# Altium PCB PCB1.PcbDoc
Units mm, origin at the board's own origin, x right, y up, seen from the top; angles counter-clockwise.
Board outline 45.09 x 60.07 mm, 2 copper layers (Top Layer, Bottom Layer); 25 components, 27 nets, 109 pads, 31 vias.
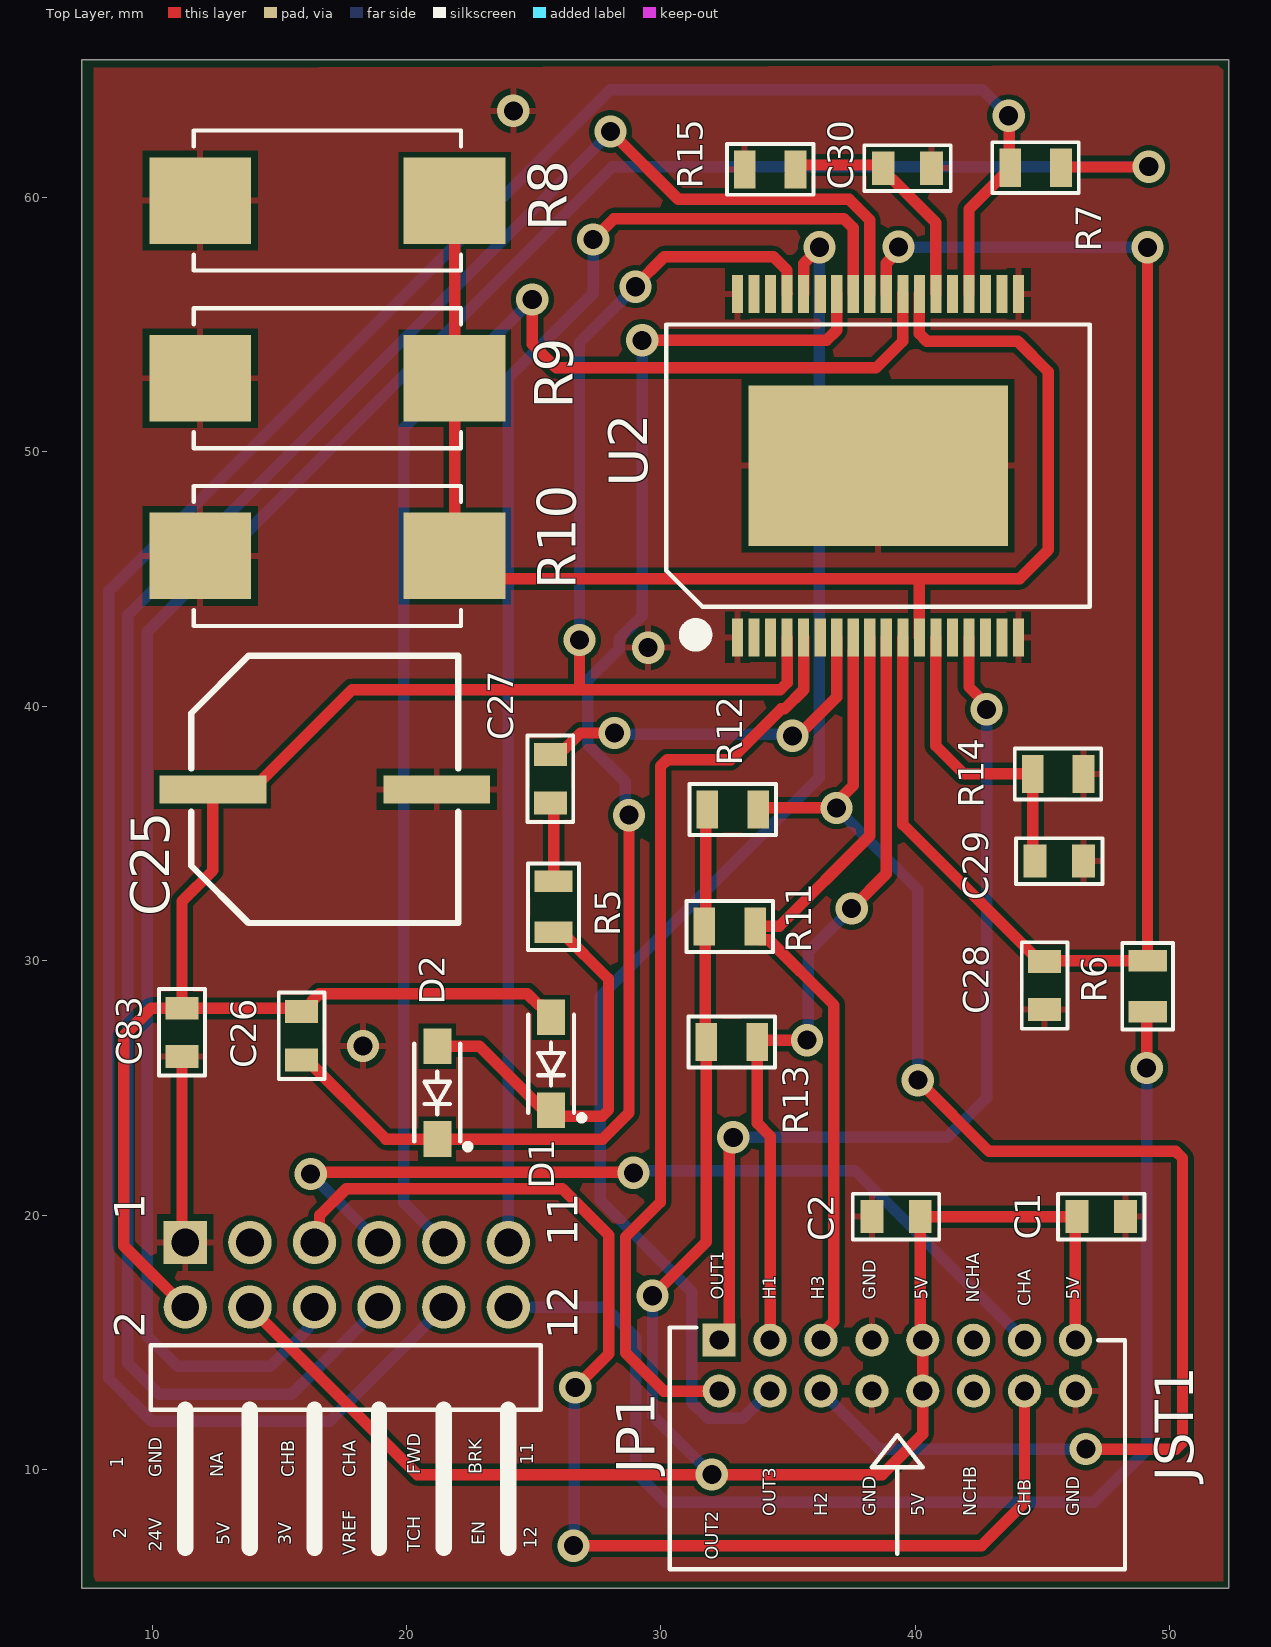
[diagram p0: Top Layer view]
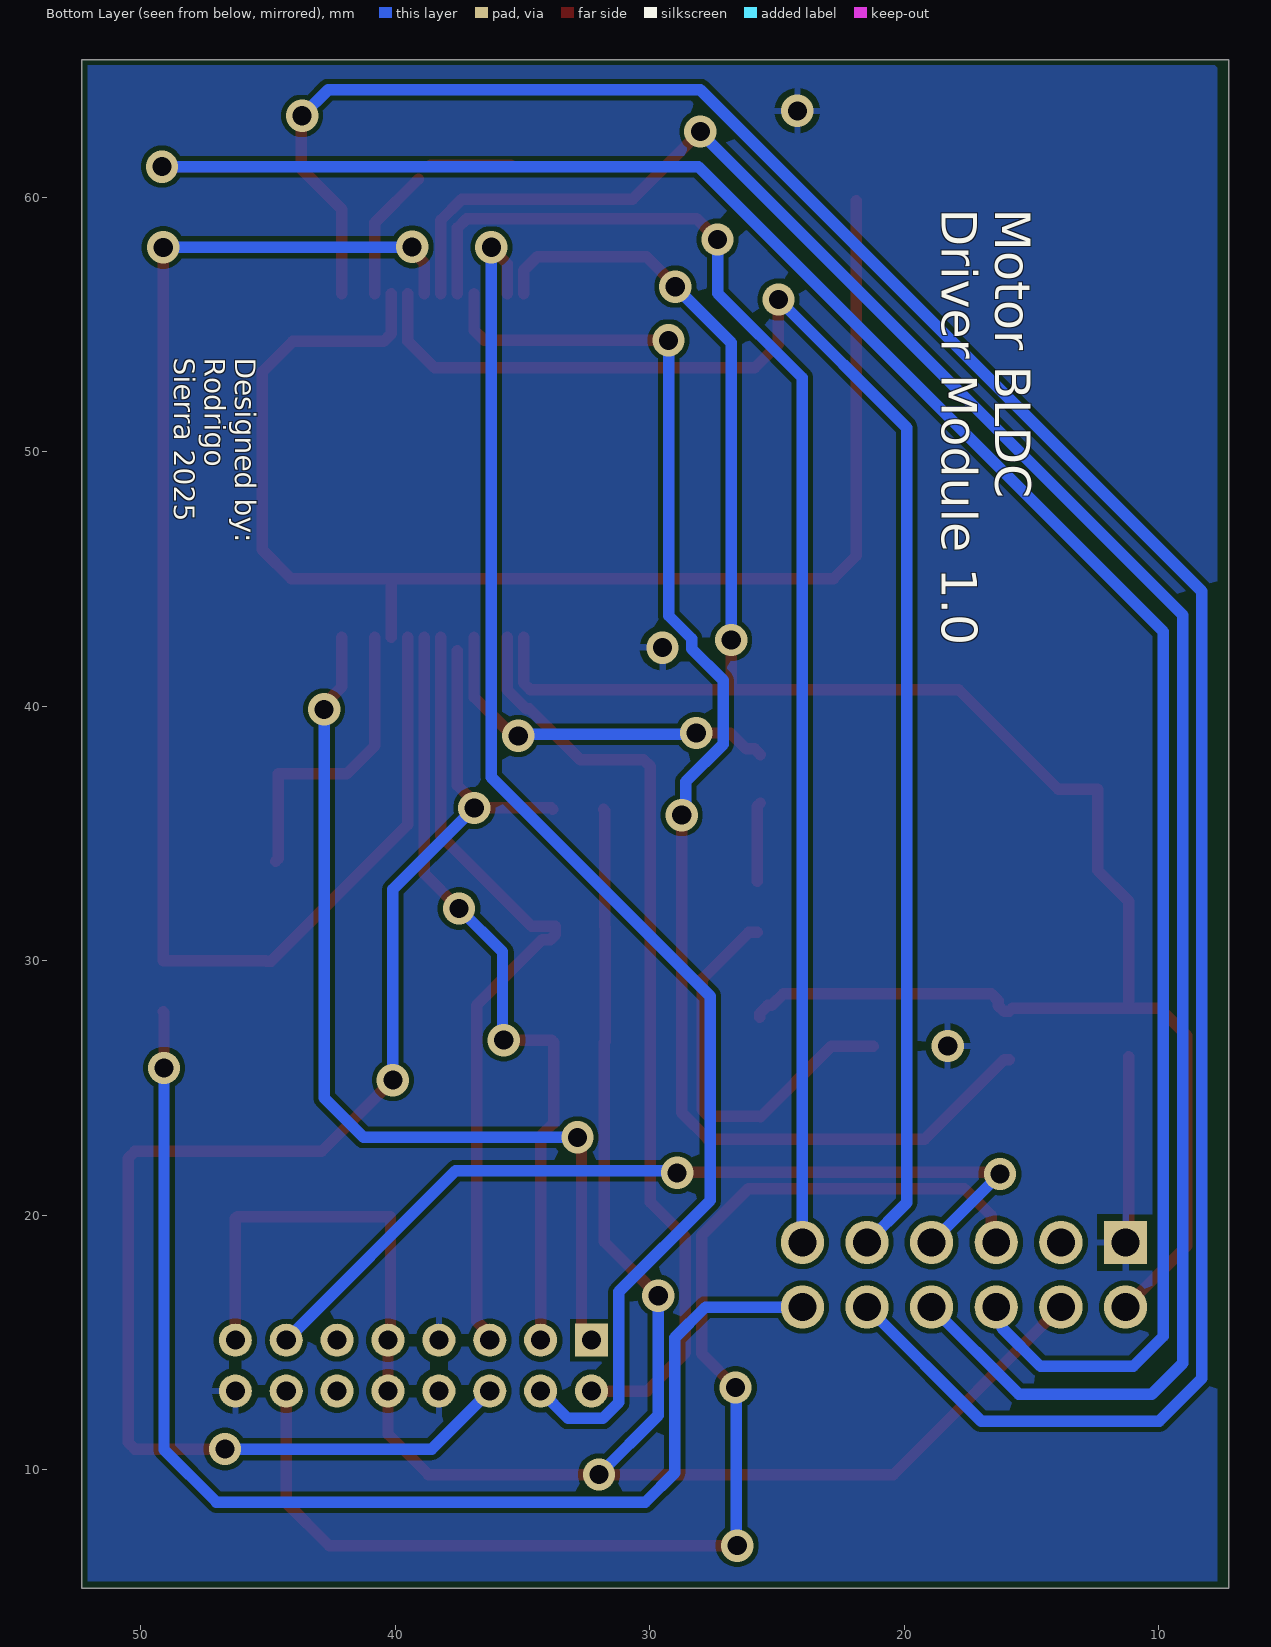
[diagram p1: Bottom Layer view, seen from below]
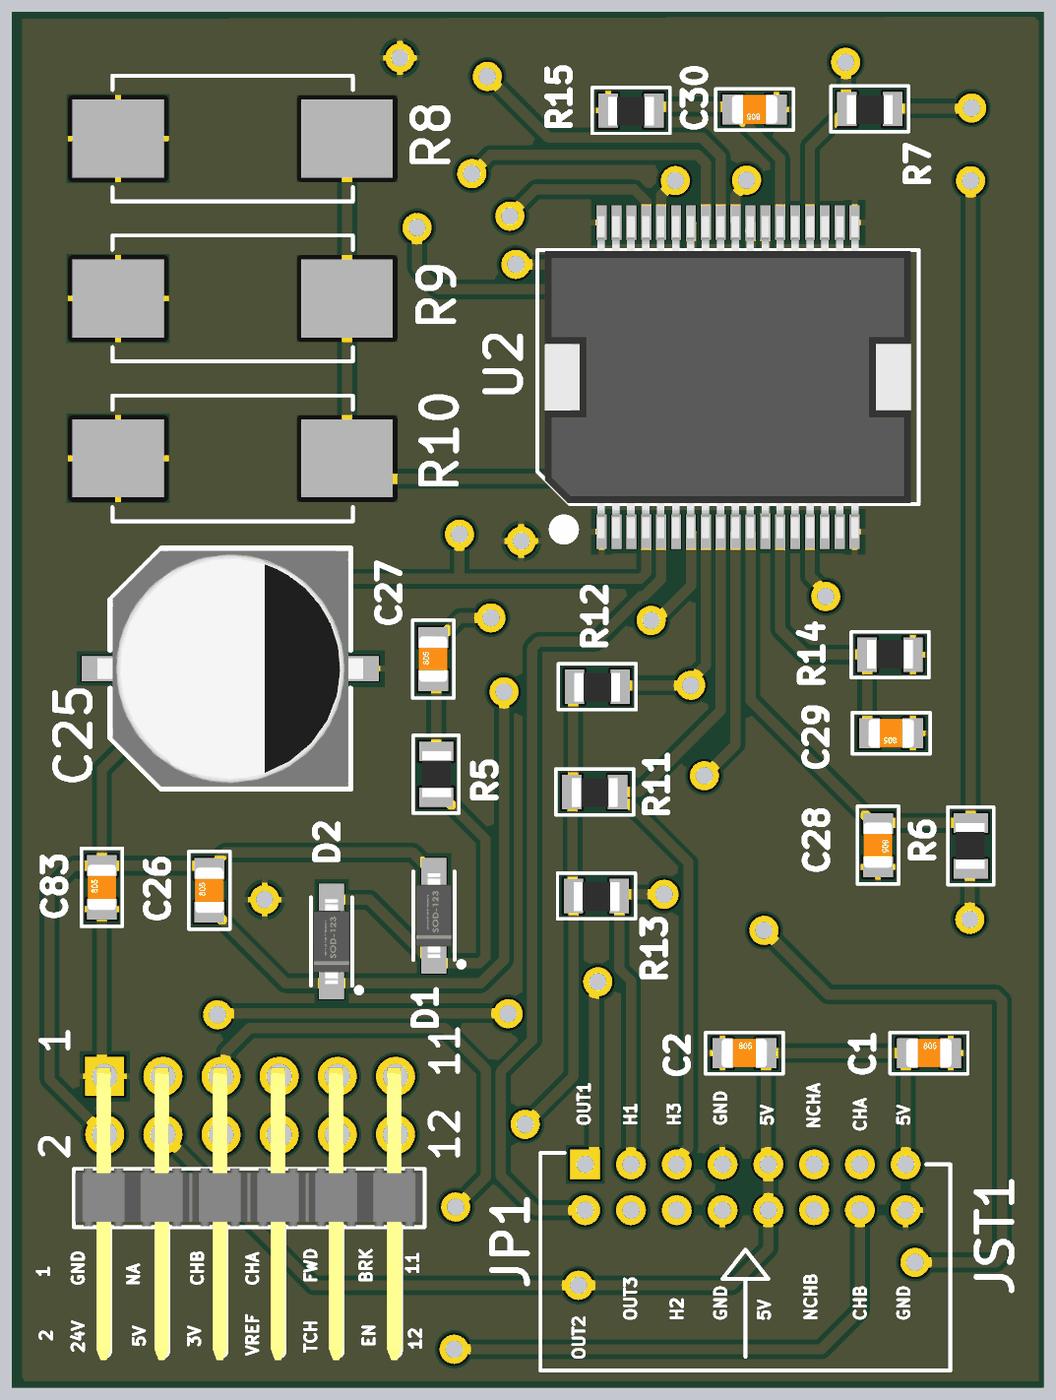
[diagram p2: 3D render of the assembled board from above, using the file's embedded part models]

## Layer stack, top to bottom
Top Solder: solder mask 0.0102, Solder Resist, Dk 3.5
Top Layer: signal copper 0.0356
Dielectric 1: dielectric 0.32, FR-4, Dk 4.8
Bottom Layer: signal copper 0.0356
Bottom Solder: solder mask 0.0102, Solder Resist, Dk 3.5

## Board outline
7.239,5.334 52.324,5.334 52.324,65.405 7.239,65.405

## Design rules (kind name [scope] priority, off if disabled: settings)
Clearance [All] p1: gap=0.2 ignorepadtopadclearanceinfootprint=FALSE
ComponentClearance [All] p1: gap=0.15 collisioncheckmode=3 verticalgap=0.15 showdistances=FALSE
DiffPairsRouting [All] p1: maxlimit=0.254 minlimit=0.05 mostfreqgap=0.254 toplayer_minwidth=0.05 toplayer_maxwidth=0.381 toplayer_prefwidth=0.381 bottomlayer_minwidth=0.05 bottomlayer_maxwidth=0.381 bottomlayer_prefwidth=0.381 maxuncoupledlength=12.7
Height [All] p1: minheight=0 maxheight=25.4 prefheight=25.4
HoleSize [All] p1: absolutevalues=TRUE maxlimit=2.54 minlimit=0.4 maxpercent=80.000 minpercent=20.000
HoleToHoleClearance [All] p1: gap=0.05 allowstackedmicrovias=TRUE
MinimumSolderMaskSliver [All] p1: minsoldermaskwidth=0.05
PolygonConnect [All] p1: connectstyle=Relief reliefconductorwidth=0.254 reliefentries=4 polygonreliefangle="90 Angle" airgapwidth=0.254
RoutingVias [All] p1: holewidth=0.711 width=1.27 viastyle="Through Hole" minholewidth=0.711 minwidth=1.27 maxholewidth=0.711 maxwidth=1.27
SilkToSilkClearance [All] p1: silktosilkclearance=0.05
SilkToSolderMaskClearance [IsPad] p1: minsilkscreentomaskgap=0.05 clearancetoexposedcopper=TRUE
SolderMaskExpansion [All] p1: expansion=0.102 istentingtop=FALSE
SupplyNets "Schematic Supply Nets_5" [InNet('+5V')] p1: voltage=0.000
SupplyNets "Schematic Supply Nets_4" [InNet('+3V3')] p2: voltage=0.000
SupplyNets "Schematic Supply Nets_1" [InNet('+24V')] p3: voltage=0.000
SupplyNets "Schematic Supply Nets" [InNet('GND')] p4: voltage=0.000
UnRoutedNet UnRoutedNet_1 [All] p1:
UnRoutedNet [All] p2:
Width [All] p1: maxlimit=0.5 minlimit=0.3 preferedwidth=0.3 minimp=50.000000 maximp=50.000000 favimp=50.000000
21 further rules are at their usual default settings.

## Components (designator, comment, footprint, x,y, rotation, side; value= is the part's Value field where it differs from the comment)
C1 "100nF" C0805 47.31,19.939 r0 top
C2 "100nF" C0805 39.243,19.939 r0 top
C25 "100uF" "Radial SMD 10D" 16.764,36.703 r90 top
C26 "220nF" C0805 15.875,27.051 r90 top
C27 "10nF" C0805 25.654,37.145 r90 top
C28 "5.6nF" C0805 45.085,29.022 r270 top
C29 "1nF" C0805 45.659,33.909 r180 top
C30 "10nF" C0805 39.69,61.145 r180 top
C83 "100nF" C0805 11.176,27.178 r90 top
D1 "1N4148" SOD-123 25.682,25.942 r0 top
D2 "1N4148" SOD-123 21.209,24.812 r0 top
JP1 "Header90 12POS" HEADER90_06X2 11.303,18.923 r90 top
JST1 "16P" JST16P 32.291,15.081 r90 top
R5 "100" R0805 25.806,32.115 r90 top
R6 "100k" R0805 49.108,28.988 r270 top
R7 "10k" R0805 44.725,61.142 r0 top
R8 "0R82" R4122 16.891,59.875 r90 top
R9 "0R82" R4122 16.891,52.89 r90 top
R10 "0R82" R4122 16.891,45.905 r90 top
R11 "10k" R0805 32.71,31.319 r0 top
R12 "10k" R0805 32.821,35.916 r0 top
R13 "10k" R0805 32.782,26.772 r0 top
R14 "33k" R0805 45.609,37.363 r180 top
R15 "47k" R0805 34.292,61.076 r0 top
U2 "Comment" POWERSO36 38.735,49.53 r90 top

## Footprints (in the part's own frame and the unit in brackets; to place one, negate y for a bottom-side part, rotate by r counter-clockwise, add the part's x,y. Pads: shape width x height; smd on the part's side, far side on the other; paste and mask are expansions set on the pad)
C0805 [mm]
  rect 0.9x1.3 smd: 1(-0.95,0) 2(0.95,0)
  Top Layer pour cut-out: -0.5,0.83 0.5,0.83 0.5,-0.83 -0.5,-0.83
  silkscreen extent -1.7,-0.9 1.7,0.9, body extent -1,-0.62 1,0.63, height 0.78
HEADER90_06X2 [mm]
  rect 1.7x1.7 hole 1.1: 1(0,0)
  round 1.7 hole 1.1: 2(-2.54,0) 3(0,-2.54) 4(-2.54,-2.54) 5(0,-5.08) 6(-2.54,-5.08) 7(0,-7.62) 8(-2.54,-7.62) 9(0,-10.16) 10(-2.54,-10.16) 11(0,-12.7) 12(-2.54,-12.7)
  silkscreen extent -12,-13.97 -4.04,1.35, body extent -12.4,-13.92 0.37,1.32, height 4.95
JST16P [mm]
  rect 1.3x1.3 hole 0.75: 1(0,0)
  round 1.3 hole 0.75: 2(-2,0) 3(0,-2) 4(-2,-2) 5(0,-4) 6(-2,-4) 7(0,-6) 8(-2,-6) 9(0,-8) 10(-2,-8) 11(0,-10) 12(-2,-10) 13(0,-12) 14(-2,-12) 15(0,-14) 16(-2,-14)
  silkscreen extent -9,-15.95 0.5,1.95
POWERSO36 [mm] "2.0 mm × 1.25 mm size of component"
  rect 1.5x0.44 smd mask+0.05: 1(-6.825,5.725) 2(-6.825,5.075) 3(-6.825,4.425) 4(-6.825,3.775) 5(-6.825,3.125) 6(-6.825,2.475) 7(-6.825,1.825) 8(-6.825,1.175) 9(-6.825,0.525) 10(-6.825,-0.125) 11(-6.825,-0.775) 12(-6.825,-1.425) 13(-6.825,-2.075) 14(-6.825,-2.725) 15(-6.825,-3.375) 16(-6.825,-4.025) 17(-6.825,-4.675) 18(-6.825,-5.325) 19(6.675,-5.325) 20(6.675,-4.675) 21(6.675,-4.025) 22(6.675,-3.375) 23(6.675,-2.725) 24(6.675,-2.075) 25(6.675,-1.425) 26(6.675,-0.775) 27(6.675,-0.125) 28(6.675,0.525) 29(6.675,1.175) 30(6.675,1.825) 31(6.675,2.475) 32(6.675,3.125) 33(6.675,3.775) 34(6.675,4.425) 35(6.675,5.075) 36(6.675,5.725)
  rect 6.3x10.2 smd mask+0.05: 37(-0.075,0.2)
  silkscreen extent -6.88,-8.13 5.48,8.52, body extent -7.1,-7.79 6.95,8.21, height 3.6
R0805 [mm]
  rect 0.85x1.5 smd: 1(-1,0.025) 2(1,0.025)
  Top Layer pour cut-out: -0.58,0.95 0.58,0.95 0.58,-0.9 -0.58,-0.9
  silkscreen extent -1.7,-0.97 1.7,1.03, body extent -1,-0.62 1,0.63, height 0.6
R4122 [mm] "10.5 mm × 5.5 mm size of component"
  rect 3.4x4 smd mask+0.2: 1(0,5) 2(0,-5)
  silkscreen extent -2.75,-5.25 2.75,5.25
"Radial SMD 10D" [mm] "10.3 mm × 10.3 mm size of component"
  rect 1.1x4.2 smd mask+0.05: 1(0.025,4.375) 2(0.025,-4.425)
  silkscreen extent -5.22,-5.28 5.28,5.23, body extent -5.13,-5.83 5.17,5.77, height 10.21
SOD-123 [mm] "3.84 mm × 1.8 mm size of component"
  rect 1.1x1.4 smd mask+0.05: 1(0,1.825) 2(0,-1.825)
  silkscreen extent -0.9,-2.15 1.22,1.92, body extent -0.8,-1.85 0.8,1.85, height 1.25

## Part data
C1 C2 C83: library part CC0805ZRY5V9BB104, "CAP CER 0.1UF 50V Y5V 0805", Mfr 1=Yageo, Mfr 1 PN=CC0805ZRY5V9BB104
C25: library part EEE1JA101P, "CAP ALUM 100UF 20% 63V SMD", Mfr 1="Panasonic Electronic Components", Mfr 1 PN=EEE-1JA101P
C26: library part C0805C224K5RACAUTO, "CAP CER 0.22UF 50V X7R 0805", Mfr 1=KEMET, Mfr 1 PN=C0805C224K5RACAUTO
C27 C30: library part CL21B103KBANFNC, "CAP CER 10000PF 50V X7R 0805", Mfr 1="Samsung Electro-Mechanics", Mfr 1 PN=CL21B103KBANFNC
C28: library part CL21B562KBANNNC, "CAP CER 5600PF 50V X7R 0805", Mfr 1="Samsung Electro-Mechanics", Mfr 1 PN=CL21B562KBANNNC
C29: library part CL21B102KBANFNC, "CAP CER 1000PF 50V X7R 0805", Mfr 1="Samsung Electro-Mechanics", Mfr 1 PN=CL21B102KBANFNC
D1 D2: library part "1N4148W-G RHG", "DIODE GEN PURP 100V 150MA SOD123", Mfr 1="Taiwan Semiconductor Corporation", Mfr 1 PN="1N4148W-G RHG"
JP1: library part 61301221021, "CONN HEADER R/A 12POS 2.54MM", Mfr 1="Wurth Electronics Inc.", Mfr 1 PN=61301221021
JST1: library part S16B-PHDSS(LF)(SN), "CONN HEADER PHD SIDE 16POS 2MM", Mfr 1="JST Sales America Inc.", Mfr 1 PN=S16B-PHDSS(LF)(SN)
R5: library part ESR10EZPF1000, "RES SMD 100 OHM 1% 0.4W 0805", Mfr 1="Rohm Semiconductor", Mfr 1 PN=ESR10EZPF1000
R6: library part RC0805FR-07100KL, "RES SMD 100K OHM 1% 1/8W 0805", Mfr 1=Yageo, Mfr 1 PN=RC0805FR-07100KL
R7: library part CRG0805F10K/10, "RES SMD 10K OHM 1% 1/8W 0805", Mfr 1="TE Connectivity Passive Product", Mfr 1 PN=CRG0805F10K/10
R8 R9 R10: library part SMW3R82JT, "RES 0.82 OHM 5% 3W 4122", Mfr 1="TE Connectivity Passive Product", Mfr 1 PN=SMW3R82JT
R11 R12 R13: library part RC0805FR-0710KL, "RES SMD 10K OHM 1% 1/8W 0805", Mfr 1=Yageo, Mfr 1 PN=RC0805FR-0710KL
R14: library part RMCF0805FT33K0, "RES 33K OHM 1% 1/8W 0805", Mfr 1="Stackpole Electronics Inc.", Mfr 1 PN=RMCF0805FT33K0
R15: library part RC0805FR-0747KL, "RES SMD 47K OHM 1% 1/8W 0805", Mfr 1=Yageo, Mfr 1 PN=RC0805FR-0747KL
U2: library part L6235PD, "IC MOTOR DRIVER PAR 36POWERSO", Mfr 1=STMicroelectronics, Mfr 1 PN=L6235PD

## Via types
v1: diameter 1.27, hole 0.75, Top Layer to Bottom Layer, 31 vias

## Nets (pads, with @x,y where several pads share a name; then routed paths per layer and width w, separated by ;. In a path a pad name is that pad's centre, name@x,y a point inside that pad or via, vN(x,y) a via of type N, cw(c..) or ccw(c..) an arc to the next point about the centre after c; other vN are vias at no path point)
+3V3: JP1.6 R7.2 | length 86.5
  Top Layer w0.45: R7.2@45.753,61.193 49.19,61.193 v1(49.174,61.209)
  Bottom Layer w0.45: JP1.6 16.144,16.144 16.144,15.55 14.642,14.048 11.004,14.048 9.812,15.24 9.812,42.927 28.094,61.209 v1(49.174,61.209)
+5V: C1.1 C2.2 JP1.4 JST1.9 JST1.10 JST1.15 R11.1 R12.1 R13.1 | length 77.4
  Top Layer w0.45: JP1.4 20.426,9.8 38.7,9.8 40.291,11.391 JST1.10 JST1.9 40.193,15.179 C2.2 46.222,19.939 46.291,19.87 JST1.15 ; v1(29.668,16.826) 31.782,18.94 R13.1 31.746,26.833 31.746,31.308 31.765,31.328 31.765,35.886 R12.1
  Bottom Layer w0.45: v1(29.668,16.826) 29.668,12.132 v1(32,9.8)
+24V: C25.1 C26.2 C83.2 D1.1 JP1.2 U2.4 U2.33 | length 89.2
  Top Layer w0.45: JP1.2 8.89,18.796 8.89,27.051 9.967,28.128 C83.2 ; C26.2@15.748,28.128 C83.2 ; C26.2 16.075,28.001 16.3,28.226 16.3,28.426 16.574,28.7 24.749,28.7 25.207,28.242 25.357,28.242 25.682,27.917 D1.1 ; v1(26.8,42.6) 26.8,40.653 ; v1(28.999,56.488) 28.999,56.531 30.13,57.662 34.424,57.662 34.955,57.131 34.955,56.21 U2.33 ; U2.4 34.96,40.917 34.696,40.653 26.8,40.653 ; C83.2 11.176,32.33 12.389,33.543 C25.1 13.939,36.728 17.864,40.653 26.8,40.653
  Bottom Layer w0.45: v1(26.8,42.6) 26.8,54.289 v1(28.999,56.488)
GND: C1.2 C2.1 C25.2 C28.2 C29.1 C30.1 C83.1 JP1.1 JST1.7 JST1.8 JST1.16 R8.1 R9.1 R10.1 R14.1 R15.1 U2.1 U2.18 U2.19 U2.36 U2.37 | length 7.4
  Top Layer w0.45: C83.1 11.176,19.05 JP1.1
  other v1: 18.289,26.643 29.5,42.3 24.2,63.4
NetC26_1: C26.1 D2.2 U2.30 | length 55.8
  Top Layer w0.45: C26.1 16.075,26.101 19.189,22.987 D2.2 27.716,22.987 28.745,24.016 v1(28.745,35.717) ; v1(29.262,54.382) 36.512,54.382 36.91,54.78 U2.30
  Bottom Layer w0.45: v1(28.745,35.717) 28.595,35.867 28.595,37.027 27.115,38.507 27.115,41.016 28.36,42.261 28.36,42.659 29.262,43.561 v1(29.262,54.382)
NetC27_1: C27.1 R5.2 | length 3.1
  Top Layer w0.45: C27.1 25.781,36.068 R5.2
NetC27_2: C27.2 U2.7 | length 14.6
  Top Layer w0.45: C27.2 25.879,38.32 26.213,38.32 26.839,38.946 v1(28.175,38.946) ; v1(35.17,38.834) 35.384,38.834 36.91,40.36 U2.7
  Bottom Layer w0.45: v1(28.175,38.946) 28.231,38.89 35.114,38.89 v1(35.17,38.834)
NetC28_1: C28.1 R6.1 U2.11 U2.27 | length 59.1
  Top Layer w0.45: U2.27 38.86,57.415 39.339,57.894 v1(39.339,58.057) ; U2.11 39.51,35.347 44.885,29.972 C28.1 45.101,29.988 49.069,29.988 49.101,30.02 R6.1@49.126,29.995 ; v1(49.126,58.033) R6.1@49.126,29.995 ; R6.1 R6.1@49.126,29.995
  Bottom Layer w0.45: v1(39.339,58.057) 39.351,58.045 49.114,58.045 v1(49.126,58.033)
NetC29_2: C29.2 R14.2 U2.13 | length 12
  Top Layer w0.45: U2.13 40.81,38.438 41.91,37.338 R14.2 44.609,34.009 C29.2
NetC30_2: C30.2 R15.2 U2.24 | length 8.4
  Top Layer w0.45: R15.2@35.462,61.271 C30.2@38.614,61.271 ; C30.2@39.091,60.72 40.81,59.001 U2.24
NetD1_2: D1.2 D2.1 R5.1 | length 16.1
  Top Layer w0.45: D2.1 22.869,26.637 25.654,23.852 25.678,23.876 27.686,23.876 27.94,24.13 27.94,29.281 26.106,31.115 R5.1
NetJP1_5: JP1.5 JST1.14 | length 49.3
  Top Layer w0.45: JP1.5 16.58,19.12 16.58,19.982 17.632,21.034 26.13,21.034 27.958,19.206 27.958,14.544 v1(26.632,13.218) ; v1(26.564,7.006) 42.609,7.006 44.291,8.688 JST1.14
  Bottom Layer w0.45: v1(26.564,7.006) 26.598,7.04 26.598,13.184 v1(26.632,13.218)
NetJP1_7: JP1.7 JST1.13 | length 34.7
  Top Layer w0.45: v1(16.232,21.614) 16.302,21.684 28.899,21.684 v1(28.924,21.659)
  Bottom Layer w0.45: v1(16.232,21.614) JP1.7 ; v1(28.924,21.659) 29.012,21.747 37.625,21.747 JST1.13
NetJP1_8: JP1.8 U2.28 | length 82.6
  Top Layer w0.45: v1(28.015,62.59) 30.679,59.926 37.394,59.926 38.21,59.11 U2.28
  Bottom Layer w0.45: JP1.8 15.493,12.953 10.275,12.953 9.05,14.178 9.05,43.585 28.015,62.55 v1(28.015,62.59)
NetJP1_9: JP1.9 U2.26 | length 58.9
  Top Layer w0.45: v1(24.943,55.989) 24.943,54.234 25.883,53.294 38.454,53.294 39.51,54.35 39.51,55.786 U2.26 ; U2.26@39.505,55.786 39.505,55.901 U2.26@39.51,55.906
  Bottom Layer w0.45: JP1.9 19.9,20.486 19.9,50.946 v1(24.943,55.989)
NetJP1_10: JP1.10 R7.1 U2.22 | length 98.2
  Top Layer w0.45: U2.22 42.11,59.537 R7.1@43.7,61.127 ; v1(43.667,63.207) 43.696,63.178 R7.1@43.696,61.167
  Bottom Layer w0.45: JP1.10 16.975,11.895 9.984,11.895 8.305,13.574 8.305,44.521 28.018,64.234 42.64,64.234 v1(43.667,63.207)
NetJP1_11: JP1.11 U2.29 | length 54.1
  Top Layer w0.45: v1(27.337,58.344) 28.154,59.161 37.196,59.161 37.56,58.797 U2.29
  Bottom Layer w0.45: JP1.11 24.003,52.901 27.337,56.235 v1(27.337,58.344)
NetJP1_12: JP1.12 R6.2 | length 49.5
  Top Layer w0.45: v1(49.094,25.78) 49.094,27.949 R6.2
  Bottom Layer w0.45: JP1.12 27.808,16.383 29.018,15.173 29.018,9.871 30.172,8.717 47.035,8.717 49.094,10.776 v1(49.094,25.78)
NetJST1_1: JST1.1 U2.15 | length 37.2
  Top Layer w0.45: JST1.1 32.685,15.475 32.685,22.896 v1(32.842,23.053) ; U2.15 42.11,40.755 42.799,40.066 v1(42.799,39.878)
  Bottom Layer w0.45: v1(32.842,23.053) 41.253,23.053 42.799,24.599 v1(42.799,39.878)
NetJST1_2: JST1.2 U2.5 | length 36.9
  Top Layer w0.45: JST1.2 30.111,13.081 28.608,14.584 28.608,19.133 29.984,20.509 29.984,37.635 30.248,37.899 32.736,37.899 34.731,39.894 34.857,39.894 35.61,40.647 U2.5
NetJST1_3: JST1.3 R13.2 U2.10 | length 31
  Top Layer w0.45: JST1.3 34.291,23.103 33.782,23.612 R13.2 33.857,26.872 v1(35.74,26.872) ; v1(37.497,32.051) 38.86,33.414 U2.10
  Bottom Layer w0.45: v1(35.74,26.872) 35.79,26.922 35.79,30.344 v1(37.497,32.051)
NetJST1_4: JST1.4 U2.32 | length 56.3
  Top Layer w0.45: U2.32 35.61,57.396 36.23,58.016 v1(36.23,58.038)
  Bottom Layer w0.45: JST1.4 33.216,12.006 31.846,12.006 31.216,12.636 31.216,16.981 27.621,20.576 27.621,28.6 36.23,37.209 v1(36.23,58.038)
NetJST1_5: JST1.5 R11.2 U2.9 | length 31.7
  Top Layer w0.45: JST1.5 36.291,15.311 36.8,15.82 36.8,28.254 34.235,30.819 33.91,30.819 33.71,31.019 R11.2 34.644,31.344 38.21,34.91 U2.9
NetJST1_6: JST1.6 R12.2 U2.8 | length 59.7
  Top Layer w0.45: R12.2 33.88,36 v1(36.9,36) 36.9,36.222 37.56,36.882 U2.8@37.56,42.18 ; v1(40.1,25.3) 42.9,22.5 50.236,22.5 50.5,22.236 50.5,11.064 50.236,10.8 v1(46.7,10.8)
  Bottom Layer w0.45: JST1.6 38.572,10.8 v1(46.7,10.8) ; v1(36.9,36) 40.1,32.8 v1(40.1,25.3)
NetJST1_11: JST1.11
NetJST1_12: JST1.12
NetR8_2: R8.2 R9.2 R10.2 U2.12 U2.25 | length 54.7
  Top Layer w0.45: R8.2 R9.2 R10.2 22.778,45.018 40.16,45.018 ; U2.12 40.16,45.018 ; U2.25 40.16,54.635 40.451,54.344 44.026,54.344 45.232,53.138 45.232,46.147 44.103,45.018 40.16,45.018
pads on no net: JP1.3 U2.2 U2.3 U2.6 U2.14 U2.16 U2.17 U2.20 U2.21 U2.23 U2.31 U2.34 U2.35

## Polygon pours and split planes (outlines as drawn)
GND on Bottom Layer "GND_L02_P001" (solid, pour order 1): 52.1,65.2 52.1,5.6 7.7,5.6 7.7,65.1 7.8,65.2
GND on Top Layer "GND_L01_P000" (solid, pour order 0): 52.1,65.2 52.1,5.6 7.5,5.6 7.7,5.8 7.7,65.1

## Silkscreen, mask and mechanical layers (free items; w line width, h text height)
Top Overlay:
  text "OUT1" at 32.479,16.67 h0.5 r90
  text "H1" at 34.511,16.67 h0.5 r90
  text "H3" at 36.416,16.67 h0.5 r90
  text "GND" at 38.448,16.67 h0.5 r90
  text "5V" at 40.48,16.67 h0.5 r90
  text "5V" at 46.449,16.67 h0.5 r90
  text "NCHA" at 42.512,16.543 h0.5 r90
  text "CHA" at 44.544,16.416 h0.5 r90
  text "11" at 24.986,10.193 h0.5 r90
  text "1" at 8.857,10.066 h0.5 r90
  text "FWD" at 20.541,9.812 h0.5 r90
  text "BRK" at 22.954,9.812 h0.5 r90
  text "GND" at 10.381,9.685 h0.5 r90
  text "NA" at 12.794,9.685 h0.5 r90
  text "CHB" at 15.588,9.685 h0.5 r90
  text "CHA" at 18.001,9.685 h0.5 r90
  text "OUT3" at 34.511,8.161 h0.5 r90
  text "H2" at 36.543,8.161 h0.5 r90
  text "GND" at 38.448,8.161 h0.5 r90
  text "5V" at 40.353,8.161 h0.5 r90
  text "NCHB" at 42.385,8.161 h0.5 r90
  text "CHB" at 44.544,8.161 h0.5 r90
  text "GND" at 46.449,8.161 h0.5 r90
  text "2" at 8.984,7.272 h0.5 r90
  text "5V" at 13.048,7.018 h0.5 r90
  text "3V" at 15.461,7.018 h0.5 r90
  text "EN" at 23.081,7.018 h0.5 r90
  text "12" at 25.113,6.891 h0.5 r90
  text "24V" at 10.381,6.764 h0.5 r90
  text "TCH" at 20.541,6.764 h0.5 r90
  text "VREF" at 18.001,6.637 h0.5 r90
  text "OUT2" at 32.26,6.46 h0.5 r90
Bottom Overlay:
  text "Motor BLDC  / Driver Module 1.0" at 18.52,59.56 h1.4 r90
  text "Designed by:  / Rodrigo  / Sierra 2025" at 48.7,53.7 h0.8 r90

## Text inside footprints (layer, text, board x,y; h text height)
JP1: Top Overlay "12" at 26.728,15.123 h1.2 r90; Top Overlay "11" at 26.728,18.773 h1.2 r90; Top Overlay "2" at 9.703,15.173 h1.2 r90; Top Overlay "1" at 9.703,19.798 h1.2 r90